# EAGLE board ubadge (EAGLE 9.0.1)
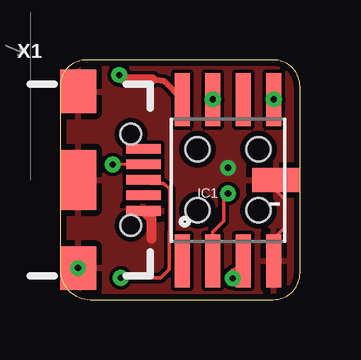
[diagram p0: board, top side]
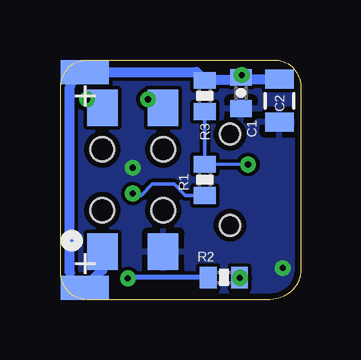
[diagram p1: board, bottom side, seen from below]

Size 10 x 10 mm. Coordinates in mm from the lower left corner, seen from the top.
Outline: 0,8.89 0,1.27 arc90 1.27,0 8.89,0 arc90 10,1.11 10,8.89 arc90 8.89,10 1.11,10 arc90 0,8.89
Copper layers (1*16): Top 0.035mm / dielectric 1.5mm / Bottom 0.035mm
Design rules "default *": minimum track width 6mil, minimum drill 10mil, track to track 6mil, track to pad 6mil, pad to pad 6mil, via to via 6mil, smd to smd 6mil, copper to edge 10mil, drill to drill 10mil, minimum pad ring 10mil, minimum via ring 8mil, stop-mask expansion 2mil, vias tented up to drill 15mil, thermal gap 10mil

## Footprints (pad centres in the part's own frame; a part is rotated, then mirrored left to right if it is on the bottom)
0402-CAP = smd 0.7 x 0.9: 1 -0.65,0; 2 0.65,0
0805 = smd 0.8 x 1.2: 1 -0.9,0; 2 0.9,0
SO08-EIAJ = smd 0.61 x 2.21: 1 -1.905,-3.378; 2 -0.635,-3.378; 3 0.635,-3.378; 4 1.905,-3.378; 5 1.905,3.353; 6 0.635,3.353; 7 -0.635,3.353; 8 -1.905,3.353
0402-RES = smd 0.7 x 0.9: 1 -0.65,0; 2 0.65,0
SAO-SMD-BADGE-SOCKET = smd 1.54 x 1.27: GND -3,-1.27; SCL 3,-1.27; SDA 3,1.27; VCC -3,1.27 | hole 1: 1.27,1.27; 1.27,-1.27; -1.27,-1.27; -1.27,1.27
CR2032-VERT = smd 2 x 1 bottom: N1 0,0 | smd 2 x 1: P1 0,4.5; P2 0,-4.5
USB-B-MICRO-SMD = smd 1.45 x 0.4: D+ 2.725,0; D- 2.725,0.65; GND 2.725,-1.3; ID 2.725,-0.65; VBUS 2.725,1.3 | smd 1.5 x 1.8: SHIELD1 0,3.685; SHIELD2 0,-3.685 | smd 1.5 x 2.5: SHIELD3 0,0 | hole 0.85: 2.2,1.9; 2.2,-1.9

## Placement (x,y rotation side)
C1  0.1uf  [0402-CAP]  2.49,8.62 270 bottom
C2  4.7uf  [0805]  0.89,8.3 270 bottom
IC1  ATTINY85  [SO08-EIAJ]  7,5 0 top
R1  66.5R  [0402-RES]  4,5 270 bottom
R2  66.5R  [0402-RES]  3.2,0.92 180 bottom
R3  1K5  [0402-RES]  4,8.5 270 bottom
U$1  SAO-SMT-BOARD  [SAO-SMD-BADGE-SOCKET]  7,5 90 bottom
U$2  CR2032-VERT  [CR2032-VERT]  9,5 0 bottom
X1  [USB-B-MICRO-SMD]  0.75,5 0 top

## Library data of the parts
C1 C2 IC1 R1-R3 = SparkFun
U$1 = SAO
U$2 = cr2032-vert
X1 = SparkFun-Connectors; PROD_ID: CONN-11752

## Nets
DM: R1.1 R3.2 X1.D-
DM-TINY: IC1.2 R1.2
DP: R2.1 X1.D+
DP-TINY: IC1.3 R2.2
GND: C1.2 C2.2 IC1.4 U$1.GND U$2.N1 X1.GND X1.SHIELD1 X1.SHIELD2 X1.SHIELD3
SCL: IC1.7 U$1.SCL
SDA: IC1.5 U$1.SDA
VBUS: X1.VBUS
VCC: C1.1 C2.1 IC1.8 R3.1 U$1.VCC U$2.P1 U$2.P2

## Tracks (layer width: path | path; a pad name or v marks a point on that pad's centre or on a via)
DM  (via drill 0.25)
  Top 0.152: X1.D- v2.2,5.64
  Bottom 0.152: R3.2 R1.1 v2.2,5.64
DM-TINY  (via drill 0.25)
  Top 0.152: IC1.2 6.37,2.83 6.81,3.28 6.81,4.24 v7,4.42
  Bottom 0.152: v7,4.42 6.93,4.35 6.64,4.35 6.18,4.81 5.28,4.81 4.82,4.35 R1.2
DP  (via drill 0.25)
  Top 0.152: X1.D+ 3.77,4.84 4.32,4.84 4.58,4.62 4.58,2.84 4.56,2.82 4.56,1.27 4.19,0.9 v2.53,0.9
  Bottom 0.203: R2.1 v2.53,0.9
DP-TINY  (via drill 0.25)
  Top 0.152: 7.63,1.29 IC1.3 7.2,1.19
  Top 0.254: 7.2,1.19 v7.2,0.89
  Bottom 0.203: R2.2 7.17,0.92 v7.2,0.89
GND  (via drill 0.25)
  Top 0.152: U$2.N1 9,4.53 9.35,4.18 9.35,3 8.89,2.54 8.89,1.64 IC1.4
  Top 0.406: X1.GND 3.81,3.37 3.81,2.54
  Bottom 0.254: U$1.GND 5.73,2.12
  other vias: 0.75,1.31 7,5.5
  pour Top: 0,0 0,10 11,10 11,0
  pour Bottom: 0,0 0,10 11,10 11,0
SCL  (via drill 0.25)
  Bottom 0.152: U$1.SCL 6.01,8 IC1.7
  other vias: 6.37,8.35
SDA  (via drill 0.25)
  Bottom 0.152: U$1.SDA 8.55,8 IC1.5
  other vias: 8.9,8.35
VCC  (via drill 0.25)
  Top 0.254: IC1.8 4.33,9.11 3.85,9.18
  Top 0.406: 3.85,9.18 2.66,9.18 v2.46,9.37
  Bottom 0.152: U$1.VCC 8.27,1.23 | 8.92,0.58 9,0.58 U$2.P2 9.62,1.12 | R3.1 3.96,9.11
  Bottom 0.254: R3.1 4.04,9.11 | 9.62,8.88 U$2.P1 | U$1.VCC 8.27,1.35
  Bottom 0.406: R3.1 3.95,9.1 | U$2.P1 4.35,9.5 R3.1 | 8.27,1.23 8.92,0.58 | 9.62,1.12 9.62,8.88 | C1.1 2.46,9.3 v2.46,9.37 | C1.1 2.61,9.15 R3.1 | C1.1 2.42,9.2 C2.1

## Text on the board
bStop: git.io/ / ubadge | v1.1